# EAGLE board Very Simple Computer (EAGLE 6.5.0), part 1 of 2
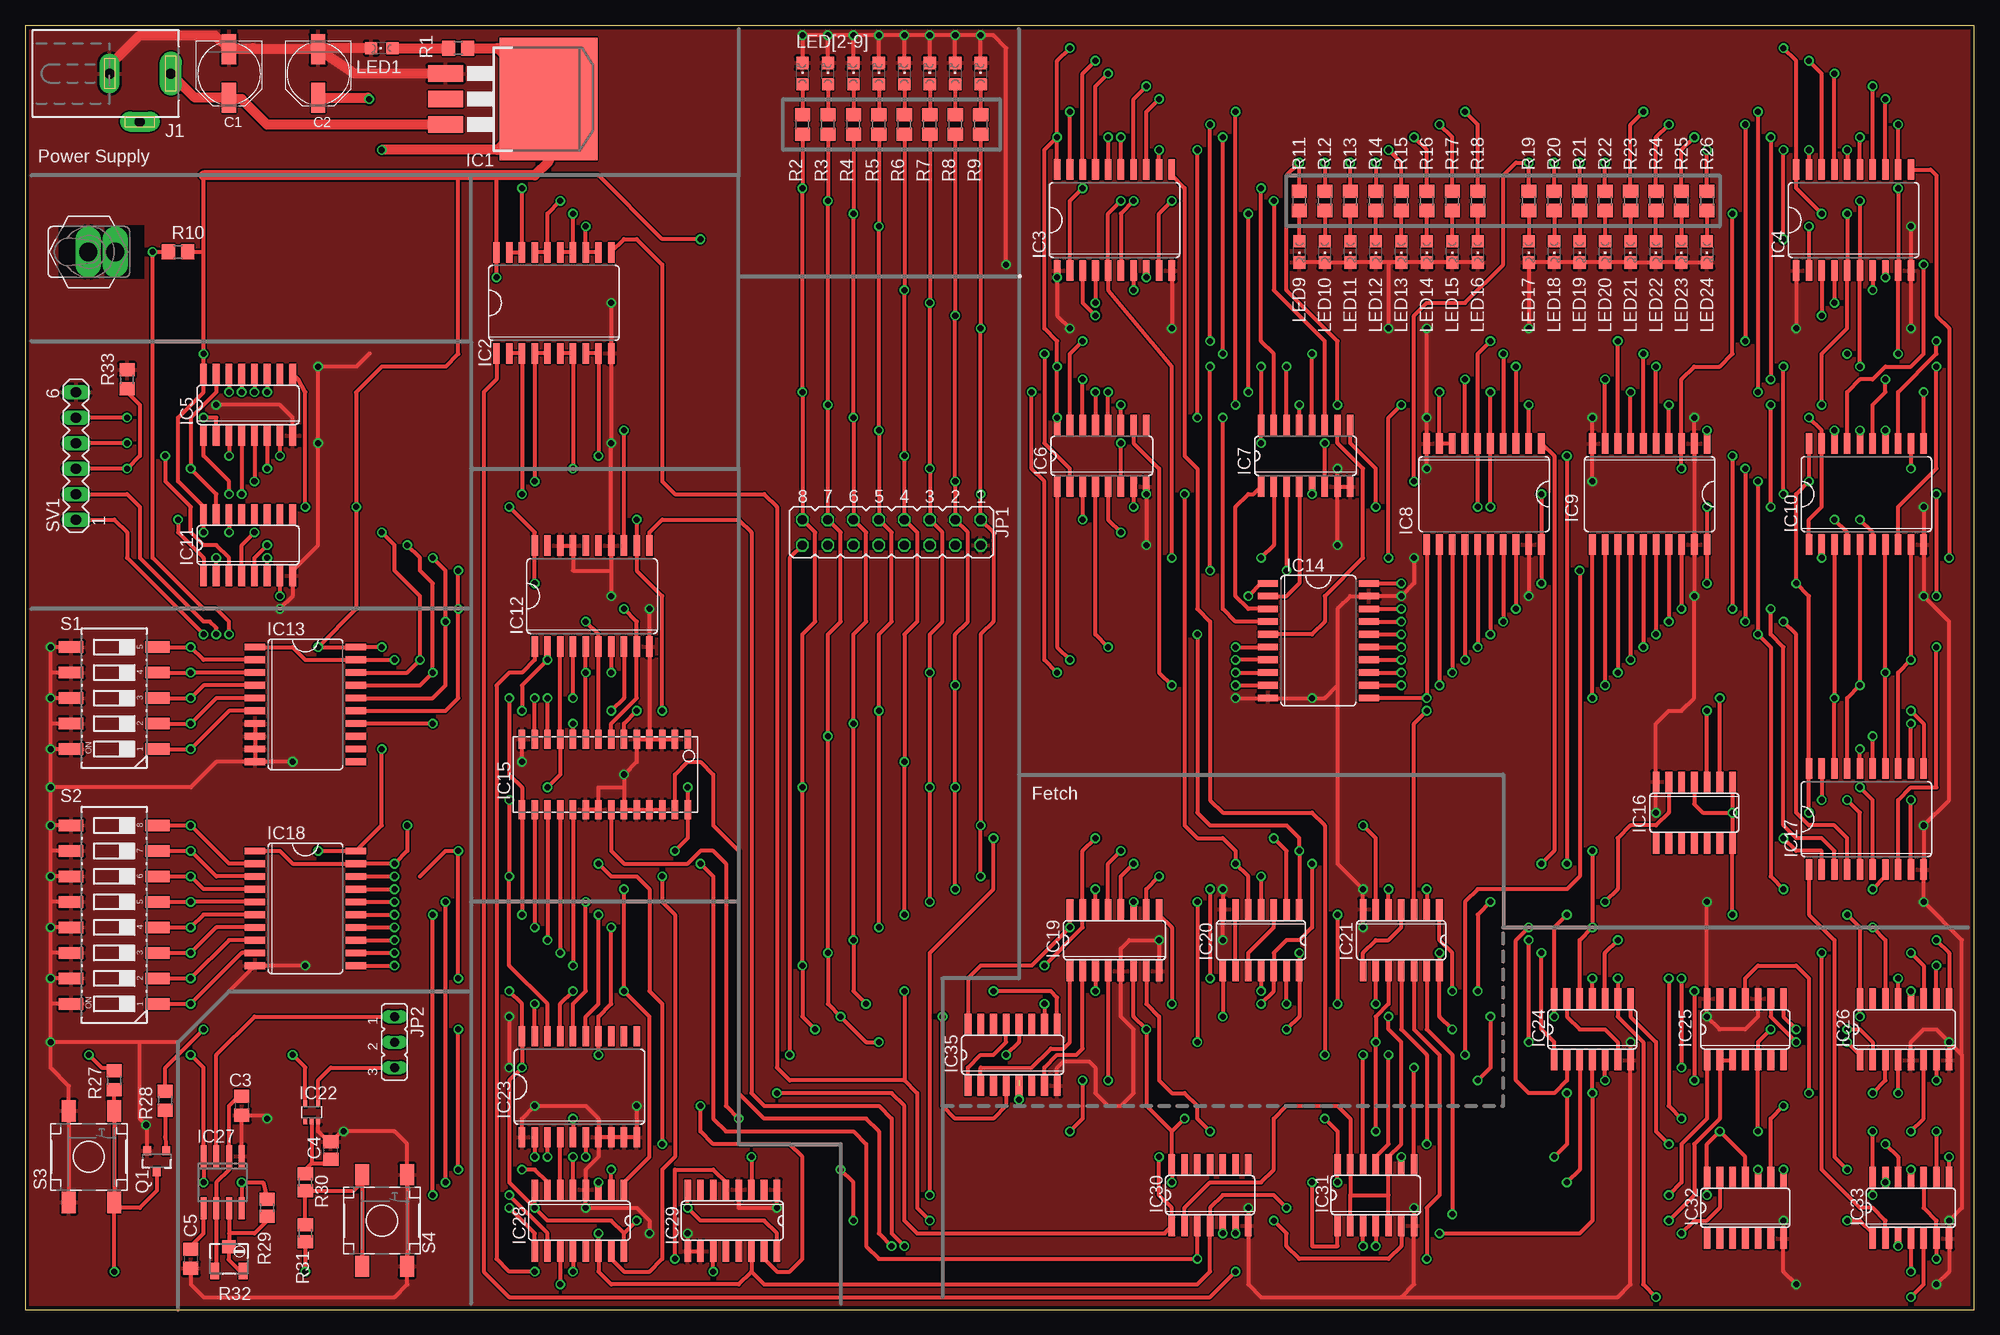
[diagram p0: board, top side]
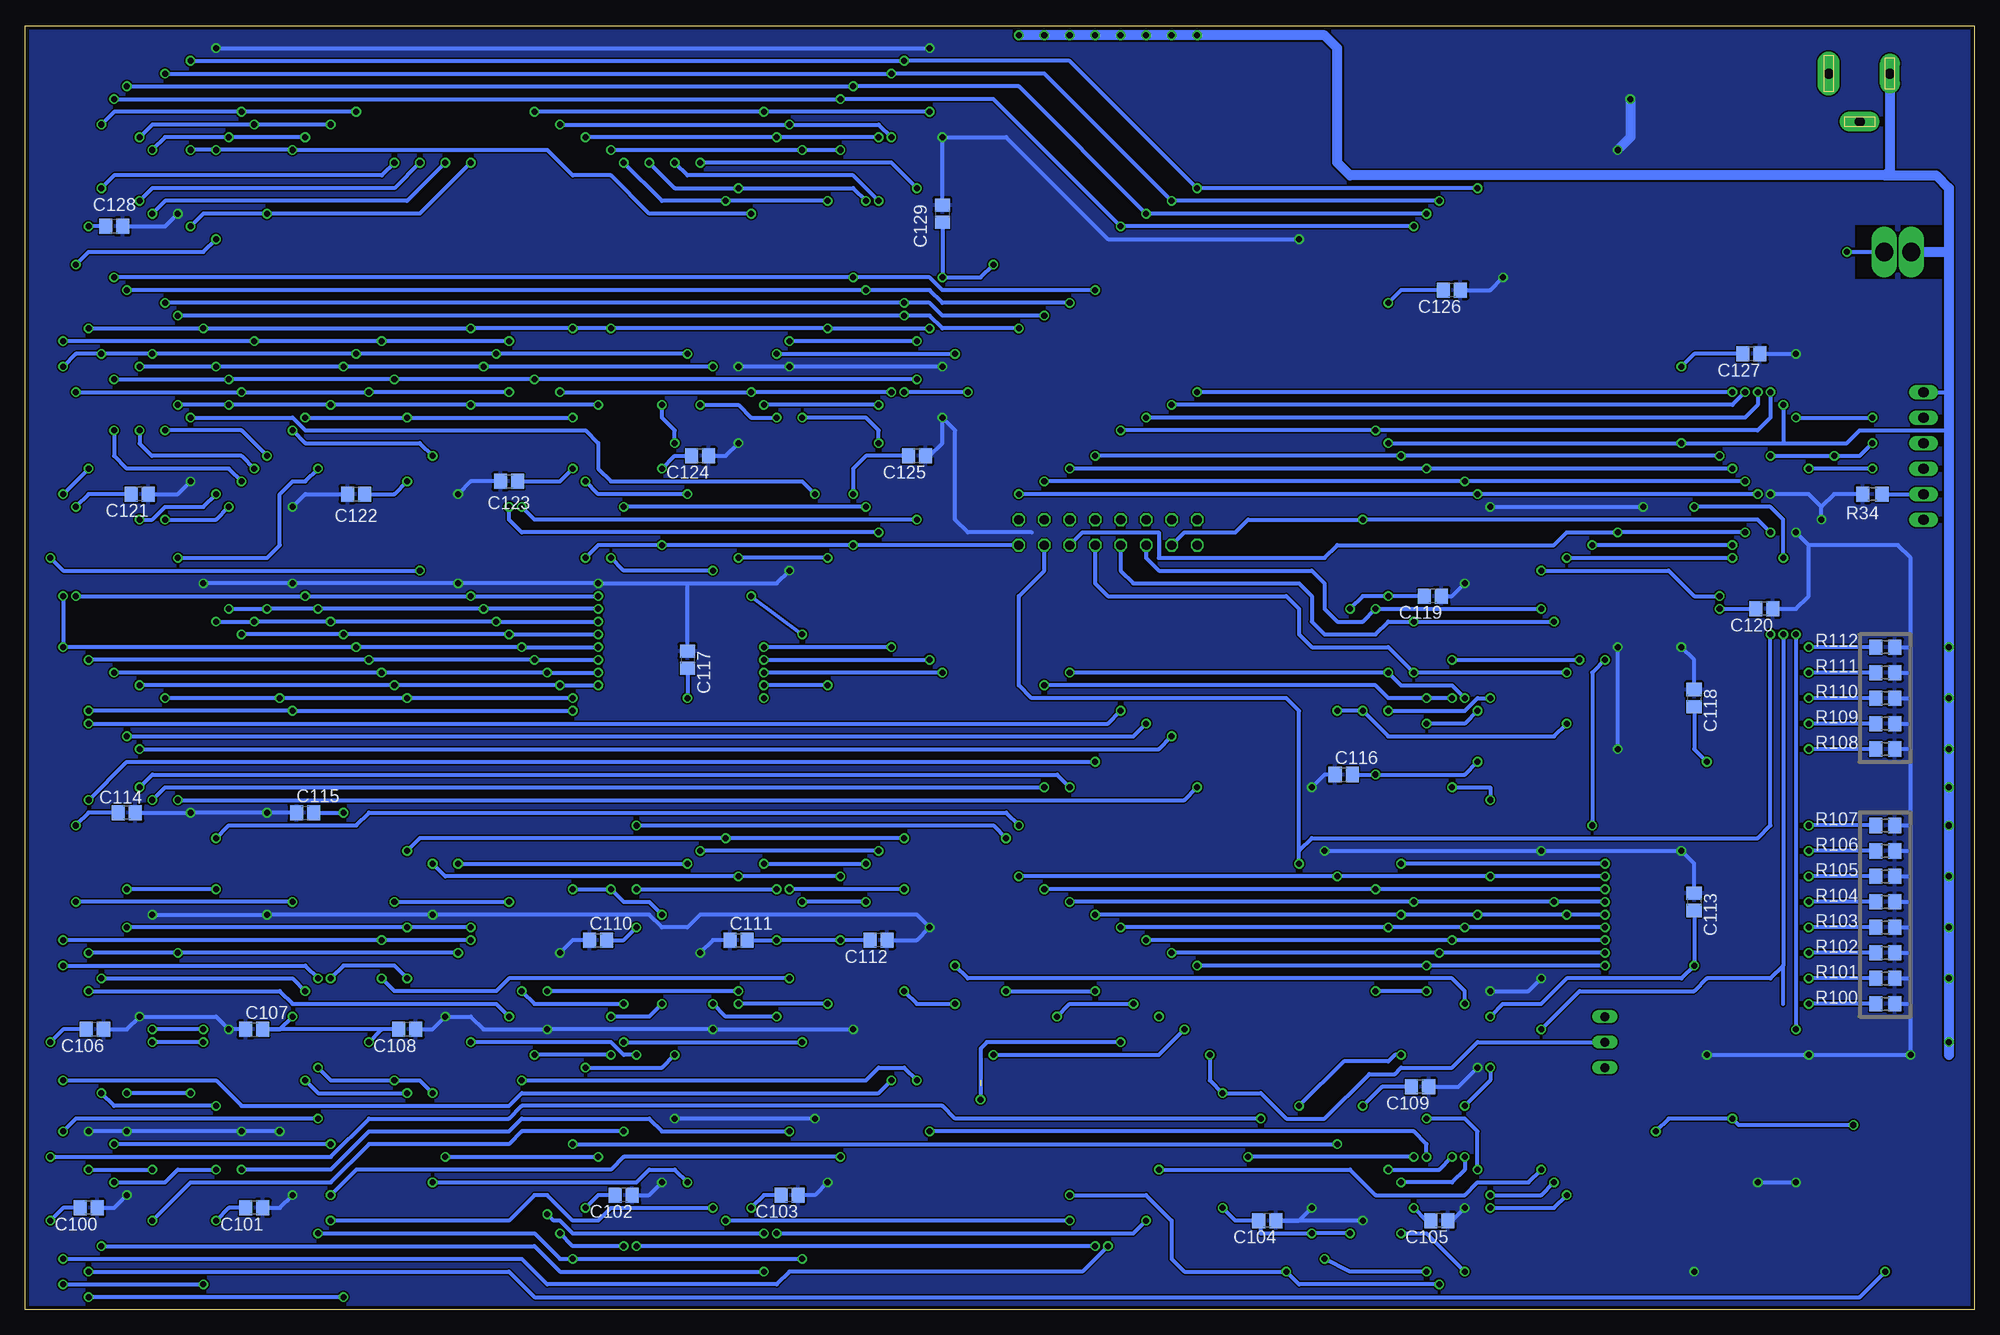
[diagram p1: board, bottom side, seen from below]

Size 194.29 x 127.94 mm. Coordinates in mm from the lower left corner, seen from the top.
Outline: 0,0 194.29,0 194.29,127.94 0,127.94 0,0
Copper layers (1*16): Top 0.0356mm / dielectric 1.5011mm / Bottom 0.0356mm
Design rules "OshPark *": minimum track width 6mil, minimum drill 13mil, track to track 6mil, track to pad 6mil, pad to pad 6mil, via to via 6mil, smd to smd 6mil, copper to edge 15mil, drill to drill 6mil, minimum pad ring 7mil, minimum via ring 7mil, stop-mask expansion 3mil, vias tented up to drill 0mil, thermal gap 10mil
Net classes: 2 Hi Power: width 1.778 mm

## Footprints (pad centres in the part's own frame; a part is rotated, then mirrored left to right if it is on the bottom)
PANASONIC_D = smd 3 x 1.4: + 2.4,0; - -2.4,0
C0805 = smd 1.3 x 1.5: 1 -0.95,0; 2 0.95,0
C0805' = smd 1.3 x 1.5: 1 -0.85,0; 2 0.85,0
D2PAK/A = smd 1.6 x 3.505: 1 -2.54,-8.89; 2 0,-8.89; 3 2.54,-8.89 | smd 12.192 x 9.754: 4 0,1.372
SO20W = smd 0.66 x 2.032: 1 -5.715,-5.029; 2 -4.445,-5.029; 3 -3.175,-5.029; 4 -1.905,-5.029; 5 -0.635,-5.029; 6 0.635,-5.029; 7 1.905,-5.029; 8 3.175,-5.029; 9 4.445,-5.029; 10 5.715,-5.029; 11 5.715,5.029; 12 4.445,5.029; 13 3.175,5.029; 14 1.905,5.029; 15 0.635,5.029; 16 -0.635,5.029; 17 -1.905,5.029; 18 -3.175,5.029; 19 -4.445,5.029; 20 -5.715,5.029
SO16 = smd 0.66 x 2.032: 1 -4.445,-3.073; 2 -3.175,-3.073; 3 -1.905,-3.073; 4 -0.635,-3.073; 5 0.635,-3.073; 6 1.905,-3.073; 7 3.175,-3.073; 8 4.445,-3.073; 9 4.445,3.073; 10 3.175,3.073; 11 1.905,3.073; 12 0.635,3.073; 13 -0.635,3.073; 14 -1.905,3.073; 15 -3.175,3.073; 16 -4.445,3.073
SOJ28/3 = smd 0.635 x 1.905: 1 -8.255,-3.505; 2 -6.985,-3.505; 3 -5.715,-3.505; 4 -4.445,-3.505; 5 -3.175,-3.505; 6 -1.905,-3.505; 7 -0.635,-3.505; 8 0.635,-3.505; 9 1.905,-3.505; 10 3.175,-3.505; 11 4.445,-3.505; 12 5.715,-3.505; 13 6.985,-3.505; 14 8.255,-3.505; 15 8.255,3.505; 16 6.985,3.505; 17 5.715,3.505; 18 4.445,3.505; 19 3.175,3.505; 20 1.905,3.505; 21 0.635,3.505; 22 -0.635,3.505; 23 -1.905,3.505; 24 -3.175,3.505; 25 -4.445,3.505; 26 -5.715,3.505; 27 -6.985,3.505; 28 -8.255,3.505
SO14 = smd 0.66 x 2.032: 1 -3.81,-3.073; 2 -2.54,-3.073; 3 -1.27,-3.073; 4 0,-3.073; 5 1.27,-3.073; 6 2.54,-3.073; 7 3.81,-3.073; 8 3.81,3.073; 9 2.54,3.073; 10 1.27,3.073; 11 0,3.073; 12 -1.27,3.073; 13 -2.54,3.073; 14 -3.81,3.073
SC70-5 = smd 0.4 x 0.7: 1 -0.65,-0.85; 2 0,-0.85; 3 0.65,-0.85; 4 0.65,0.85; 5 -0.65,0.85
SO08 = smd 0.6 x 2.2: 1 -1.905,-2.6; 2 -0.635,-2.6; 3 0.635,-2.6; 4 1.905,-2.6; 5 1.905,2.6; 6 0.635,2.6; 7 -0.635,2.6; 8 -1.905,2.6
PJ-002A = drill 1 pad 2.2 long: 1 0,3.1 | drill 1 pad 2 long: 2 0,-3; 3 4.8,0
JP8Q = drill 0.914 octagon: 1 -8.89,-1.27; 2 -8.89,1.27; 3 -6.35,-1.27; 4 -6.35,1.27; 5 -3.81,-1.27; 6 -3.81,1.27; 7 -1.27,-1.27; 8 -1.27,1.27; 9 1.27,-1.27; 10 1.27,1.27; 11 3.81,-1.27; 12 3.81,1.27; 13 6.35,-1.27; 14 6.35,1.27; 15 8.89,-1.27; 16 8.89,1.27
JP2 = drill 0.914 long: 1 -2.54,0; 2 0,0; 3 2.54,0
CHIPLED_0805 = smd 1.2 x 1.2: A 0,-1.05; C 0,1.05
SOT23-3 = smd 0.8 x 0.9: 1 -0.95,-1; 2 0.95,-1; 3 0,1.1
R0805 = smd 1.3 x 1.5: 1 -0.95,0; 2 0.95,0
R0805' = smd 1.3 x 1.5: 1 -0.85,0; 2 0.85,0
3223W = smd 0.9 x 1.6: 1 -1.4,-1.215; 3 1.4,-1.215 | smd 1.3 x 1.3: 2 0,1.215
MS243 = drill 1.803 pad 2 long: 1 0,-1.346; 2 0,1.346
CTS-219-05 = smd 1.13 x 2.44: 1 -5.08,-4.3; 2 -2.54,-4.3; 3 0,-4.3; 4 2.54,-4.3; 5 5.08,-4.3; 6 5.08,4.3; 7 2.54,4.3; 8 0,4.3; 9 -2.54,4.3; 10 -5.08,4.3
CTS-219-08 = smd 1.13 x 2.44: 1 -8.89,-4.3; 2 -6.35,-4.3; 3 -3.81,-4.3; 4 -1.27,-4.3; 5 1.27,-4.3; 6 3.81,-4.3; 7 6.35,-4.3; 8 8.89,-4.3; 9 8.89,4.3; 10 6.35,4.3; 11 3.81,4.3; 12 1.27,4.3; 13 -1.27,4.3; 14 -3.81,4.3; 15 -6.35,4.3; 16 -8.89,4.3
SMD-SW1 = smd 1.397 x 2.108: 1 2.515,4.572; 2 2.515,-4.547; 3 -1.981,4.572; 4 -1.981,-4.547
MA06-1 = drill 1.016 long: 1 -6.35,0; 2 -3.81,0; 3 -1.27,0; 4 1.27,0; 5 3.81,0; 6 6.35,0

## Placement (x,y rotation side)
C1  10uF 50V  [PANASONIC_D]  20.32,123.19 270 top
C2  10uF 50V  [PANASONIC_D]  29.21,123.19 270 top
C3  3.3uF  [C0805]  21.59,20.32 270 top
C4  1uF  [C0805']  30.48,15.88 90 top
C5  0.01uF  [C0805]  16.51,5.08 270 top
C100  [C0805']  187.96,10.16 180 bottom
C101  [C0805']  171.45,10.16 180 bottom
C102  [C0805']  134.62,11.43 180 bottom
C103  [C0805']  118.11,11.43 180 bottom
C104  [C0805']  70.48,8.89 180 bottom
C105  [C0805']  53.34,8.89 180 bottom
C106  [C0805']  187.32,27.94 180 bottom
C107  [C0805']  171.45,27.94 0 bottom
C108  [C0805']  156.21,27.94 180 bottom
C109  [C0805']  55.24,22.23 180 bottom
C110  [C0805']  137.16,36.83 0 bottom
C111  [C0805']  123.19,36.83 0 bottom
C112  [C0805']  109.22,36.83 180 bottom
C113  [C0805']  27.94,40.64 270 bottom
C114  [C0805']  184.15,49.53 180 bottom
C115  [C0805']  166.37,49.53 0 bottom
C116  [C0805']  62.87,53.34 0 bottom
C117  [C0805']  128.27,64.77 270 bottom
C118  [C0805']  27.94,60.96 270 bottom
C119  [C0805']  53.98,71.12 180 bottom
C120  [C0805']  20.95,69.85 180 bottom
C121  [C0805']  182.88,81.28 180 bottom
C122  [C0805']  161.29,81.28 0 bottom
C123  [C0805']  146.05,82.55 0 bottom
C124  [C0805']  127,85.09 180 bottom
C125  [C0805']  105.41,85.09 180 bottom
C126  [C0805']  52.07,101.6 180 bottom
C127  [C0805']  22.23,95.25 180 bottom
C128  [C0805']  185.42,107.95 180 bottom
C129  [C0805']  102.87,109.22 270 bottom
IC1  LD1086D2T50TR  [D2PAK/A]  50.8,120.65 270 top
IC2  74LS374DW  [SO20W]  52.7,100.33 0 top
IC3  74LS374DW  [SO20W]  108.58,108.58 0 top
IC4  74LS374DW  [SO20W]  182.25,108.58 0 top
IC5  4094D  [SO16]  22.23,90.17 0 top
IC6  74HCT283D  [SO16]  107.31,85.09 0 top
IC7  74HCT283D  [SO16]  127.64,85.09 0 top
IC8  74LS541DW  [SO20W]  145.41,81.28 180 top
IC9  74LS541DW  [SO20W]  161.93,81.28 180 top
IC10  74LS240DW  [SO20W]  183.51,81.28 0 top
IC11  4094D  [SO16]  22.23,76.2 0 top
IC12  74LS374DW  [SO20W]  56.52,71.12 0 top
IC13  74LS541DW  [SO20W]  27.94,60.33 270 top
IC14  74LS541DW  [SO20W]  128.91,66.67 270 top
IC15  IS61C64AL-10JLI  [SOJ28/3]  57.78,53.34 180 top
IC16  74LS74D  [SO14]  166.37,49.53 180 top
IC17  74LS374DW  [SO20W]  183.51,48.9 0 top
IC18  74LS541DW  [SO20W]  27.94,40.01 270 top
IC19  74LS138D  [SO16]  108.58,36.83 0 top
IC20  74LS08N  [SO14]  123.19,36.83 180 top
IC21  74ALS32N  [SO14]  137.16,36.83 180 top
IC22  74AHCT1G14DCK  [SC70-5]  28.57,19.68 0 top
IC23  74LS541DW  [SO20W]  55.24,22.23 0 top
IC24  74LS08N  [SO14]  156.21,27.94 0 top
IC25  74LS93D  [SO14]  171.45,27.94 0 top
IC26  74LS138D  [SO16]  187.32,27.94 0 top
IC27  NE555D  [SO08]  19.68,12.7 180 top
IC28  40193D  [SO16]  55.24,8.89 180 top
IC29  40193D  [SO16]  70.48,8.89 180 top
IC30  74ALS04D  [SO14]  118.11,11.43 0 top
IC31  74ALS32N  [SO14]  134.62,11.43 0 top
IC32  74LS74D  [SO14]  171.45,10.16 0 top
IC33  74LS08N  [SO14]  187.96,10.16 0 top
IC35  74LS175D  [SO16]  98.42,25.4 0 top
J1  2.5mm  [PJ-002A]  11.43,123.19 270 top
JP1  [JP8Q]  86.36,77.47 180 top
JP2  [JP2]  36.83,26.67 270 top
LED1  330  [CHIPLED_0805]  35.56,125.73 90 top
LED2  [CHIPLED_0805]  80.01,123.19 0 top
LED3  [CHIPLED_0805]  82.55,123.19 0 top
LED4  [CHIPLED_0805]  85.09,123.19 0 top
LED5  [CHIPLED_0805]  87.63,123.19 0 top
LED6  [CHIPLED_0805]  90.17,123.19 0 top
LED7  [CHIPLED_0805]  92.71,123.19 0 top
LED8  [CHIPLED_0805]  95.25,123.19 0 top
LED9  [CHIPLED_0805]  127,105.41 180 top
LED10  [CHIPLED_0805]  129.54,105.41 180 top
LED11  [CHIPLED_0805]  132.08,105.41 180 top
LED12  [CHIPLED_0805]  134.62,105.41 180 top
LED13  [CHIPLED_0805]  137.16,105.41 180 top
LED14  [CHIPLED_0805]  139.7,105.41 180 top
LED15  [CHIPLED_0805]  142.24,105.41 180 top
LED16  [CHIPLED_0805]  144.78,105.41 180 top
LED17  [CHIPLED_0805]  149.86,105.41 180 top
LED18  [CHIPLED_0805]  152.4,105.41 180 top
LED19  [CHIPLED_0805]  154.94,105.41 180 top
LED20  [CHIPLED_0805]  157.48,105.41 180 top
LED21  [CHIPLED_0805]  160.02,105.41 180 top
LED22  [CHIPLED_0805]  162.56,105.41 180 top
LED23  [CHIPLED_0805]  165.1,105.41 180 top
LED24  [CHIPLED_0805]  167.64,105.41 180 top
LED[2-9]  [CHIPLED_0805]  77.47,123.19 0 top
Q1  MBNT2222  [SOT23-3]  13.14,14.85 180 top
R1  [R0805]  43.18,125.73 0 top
R2  330  [R0805]  77.47,118.11 90 top
R3  [R0805]  80.01,118.11 90 top
R4  [R0805]  82.55,118.11 90 top
R5  [R0805]  85.09,118.11 90 top
R6  [R0805]  87.63,118.11 90 top
R7  [R0805]  90.17,118.11 90 top
R8  [R0805]  92.71,118.11 90 top
R9  [R0805]  95.25,118.11 90 top
R10  4.7K  [R0805]  15.24,105.41 0 top
R11  330  [R0805]  127,110.49 270 top
R12  [R0805]  129.54,110.49 270 top
R13  [R0805]  132.08,110.49 270 top
R14  [R0805]  134.62,110.49 270 top
R15  [R0805]  137.16,110.49 270 top
R16  [R0805]  139.7,110.49 270 top
R17  [R0805]  142.24,110.49 270 top
R18  [R0805]  144.78,110.49 270 top
R19  [R0805]  149.86,110.49 270 top
R20  [R0805]  152.4,110.49 270 top
R21  [R0805]  154.94,110.49 270 top
R22  [R0805]  157.48,110.49 270 top
R23  [R0805]  160.02,110.49 270 top
R24  [R0805]  162.56,110.49 270 top
R25  [R0805]  165.1,110.49 270 top
R26  [R0805]  167.64,110.49 270 top
R27  4.7K  [R0805]  8.89,22.86 90 top
R28  4.7K  [R0805]  13.96,20.85 90 top
R29  1K  [R0805']  24.13,10.16 270 top
R30  18K  [R0805']  27.94,12.7 270 top
R31  82K  [R0805']  27.94,7.62 270 top
R32  [3223W]  20.32,5.08 0 top
R33  1K  [R0805]  10.16,92.71 90 top
R34  4.7K  [R0805]  10.16,81.28 180 bottom
R100  4.7K  [R0805]  8.89,30.48 0 bottom
R101  4.7K  [R0805]  8.89,33.02 0 bottom
R102  4.7K  [R0805]  8.89,35.56 0 bottom
R103  4.7K  [R0805]  8.89,38.1 0 bottom
R104  4.7K  [R0805]  8.89,40.64 0 bottom
R105  4.7K  [R0805]  8.89,43.18 0 bottom
R106  4.7K  [R0805]  8.89,45.72 0 bottom
R107  4.7K  [R0805]  8.89,48.26 0 bottom
R108  4.7K  [R0805]  8.89,55.88 0 bottom
R109  4.7K  [R0805]  8.89,58.42 0 bottom
R110  4.7K  [R0805]  8.89,60.96 0 bottom
R111  4.7K  [R0805]  8.89,63.5 0 bottom
R112  4.7K  [R0805]  8.89,66.04 0 bottom
RESET  [MS243]  7.62,105.41 270 top
S1  219-05  [CTS-219-05]  8.89,60.96 90 top
S2  219-08  [CTS-219-08]  8.89,39.37 90 top
S3  [SMD-SW1]  6.35,15.24 0 top
S4  [SMD-SW1]  35.56,8.89 0 top
SV1  [MA06-1]  5.08,85.09 90 top

## Library data of the parts
C1-C3 C5 R1-R28 R33 R34 R100-R112 = rcl
C4 C100-C129 R29-R31 = resistor
IC1 IC20 IC21 IC24 IC31 IC33 J1 S3 S4 = rkt1
IC2-IC4 IC8-IC10 IC12-IC14 IC16-IC19 IC23 IC25 IC26 IC30 IC32 IC35 = 74xx-us
IC5 IC11 IC28 IC29 = 40xx
IC6 IC7 = 74xx-eu
IC15 = memory-sram
IC22 = 74xx-little-us
IC27 = linear
JP1 JP2 = jumper
LED1-LED24 LED[2-9] = led
Q1 = SparkFun
R32 = pot
RESET = switch
S1 S2 = switch-dil; OC_FARNELL: unknown; OC_NEWARK: unknown
SV1 = con-lstb; OC_FARNELL: unknown; OC_NEWARK: unknown

## Nets
+5V: IC35.1 IC35.13
`DEL: IC5.15 IC11.15 R33.1 SV1.3
ADD0: IC11.4 IC12.2 IC13.18 IC15.10 JP1.6
ADD1: IC11.5 IC12.5 IC13.17 IC15.9 JP1.8
ADD2: IC11.6 IC12.6 IC13.16 IC15.8 JP1.10
ADD3: IC11.7 IC12.9 IC13.15 IC15.7 JP1.12
ADD4: IC11.14 IC12.12 IC13.14 IC15.6 JP1.14
CLK: IC25.1 IC30.1 JP1.16 JP2.2
DB0: IC2.2 IC2.3 IC3.3 IC4.3 IC5.4 IC12.3 IC15.11 IC17.2 IC18.18 IC23.18 IC28.15 JP1.1 R9.1
DB1: IC2.4 IC2.5 IC3.4 IC4.4 IC5.5 IC12.4 IC15.12 IC17.5 IC18.17 IC23.17 IC28.1 JP1.3 R8.1
DB2: IC2.6 IC2.7 IC3.7 IC4.7 IC5.6 IC12.7 IC15.13 IC17.6 IC18.16 IC23.16 IC28.10 JP1.5 R7.1
DB3: IC2.8 IC2.9 IC3.8 IC4.8 IC5.7 IC12.8 IC15.15 IC17.9 IC18.15 IC23.15 IC28.9 JP1.7 R6.1
DB4: IC2.12 IC2.13 IC3.13 IC4.13 IC5.14 IC12.13 IC15.16 IC17.12 IC18.14 IC23.14 IC29.15 JP1.9 R5.1
DB5: IC2.14 IC2.15 IC3.14 IC4.14 IC5.13 IC15.17 IC17.15 IC18.13 IC35.4 JP1.11 R4.1
DB6: IC2.16 IC2.17 IC3.17 IC4.17 IC5.12 IC15.18 IC17.16 IC18.12 IC35.5 JP1.13 R3.1
DB7: IC2.18 IC2.19 IC3.18 IC4.18 IC5.11 IC15.19 IC17.19 IC18.11 IC35.12 JP1.15 R2.1
EXTCONN: IC30.5 R34.1 SV1.2
EXTLOAD: R28.2 SV1.1
GND: C1.- C2.- C3.2 C4.2 C5.2 C100.2 C101.2 C102.2 C103.2 C104.2 C105.2 C106.2 C107.2 C108.2 C109.2 C110.2 C111.2 C112.2 C113.2 C114.2 C115.2 C116.2 C117.2 C118.2 C119.2 C120.2 C121.2 C122.2 C123.2 C124.2 C125.2 C126.2 C127.2 C128.2 C129.2 IC1.1 IC2.10 IC3.1 IC3.10 IC4.1 IC4.10 IC5.8 IC6.8 IC7.7 IC7.8 IC8.10 IC8.19 IC9.2 IC9.10 IC9.19 IC10.10 IC11.8 IC12.10 IC12.14 IC12.17 IC12.18 IC13.7 IC13.8 IC13.9 IC13.10 IC14.10 IC14.19 IC15.2 IC15.3 IC15.4 IC15.5 IC15.14 IC15.20 IC15.21 IC15.23 IC15.24 IC15.25 IC15.26 IC16.7 IC17.10 IC18.10 IC19.5 IC19.8 IC20.7 IC21.7 IC22.3 IC23.1 IC23.7 IC23.8 IC23.9 IC23.10 IC24.7 IC25.10 IC25.14 IC26.5 IC26.8 IC27.1 IC28.4 IC29.1 IC29.4 IC29.9 IC29.10 IC30.7 IC31.7 IC32.7 IC33.7 IC35.8 J1.2 JP1.2 LED1.C LED2.C LED3.C LED4.C LED5.C LED6.C LED7.C LED8.C LED9.C LED10.C LED11.C LED12.C LED13.C LED14.C LED15.C LED16.C LED17.C LED18.C LED19.C LED20.C LED21.C LED22.C LED23.C LED24.C LED[2-9].C Q1.2 R33.2 RESET.1 S1.6 S1.7 S1.8 S1.9 S1.10 S2.9 S2.10 S2.11 S2.12 S2.13 S2.14 S2.15 S2.16 S3.3 S3.4 S4.1 S4.2 SV1.6
LAT1-0: IC3.2 IC7.6 R11.1
LAT1-1: IC3.5 IC7.2 R12.1
LAT1-2: IC3.6 IC7.15 R13.1
LAT1-3: IC3.9 IC7.11 R14.1
LAT1-4: IC3.12 IC6.6 R15.1
LAT1-5: IC3.15 IC6.2 R16.1
LAT1-6: IC3.16 IC6.15 R17.1
LAT1-7: IC3.19 IC6.11 R18.1
LAT2-0: IC4.2 IC7.5 IC9.3 IC10.2 R19.1
LAT2-1: IC4.5 IC7.3 IC8.2 IC9.4 IC10.4 R20.1
LAT2-2: IC4.6 IC7.14 IC8.3 IC9.5 IC10.6 R21.1
LAT2-3: IC4.9 IC7.12 IC8.4 IC9.6 IC10.8 R22.1
LAT2-4: IC4.12 IC6.5 IC8.5 IC9.7 IC10.11 R23.1
LAT2-5: IC4.15 IC6.3 IC8.6 IC9.8 IC10.13 R24.1
LAT2-6: IC4.16 IC6.14 IC8.7 IC9.9 IC10.15 R25.1
LAT2-7: IC4.19 IC6.12 IC8.8 IC8.9 IC10.17 R26.1
N$1: IC25.9 IC26.1
N$2: IC25.8 IC26.2
N$3: IC25.11 IC26.3
N$4: IC28.12 IC29.5
N$5: IC26.4 IC32.9
N$6: IC23.2 IC28.3
N$7: IC23.3 IC28.2
N$8: IC23.4 IC28.6
N$9: IC23.5 IC28.7
N$10: IC23.6 IC29.3
N$11: IC33.4 Q1.3 R27.1 S3.1 S3.2
N$12: IC20.8 IC20.13
N$13: IC20.6 IC20.9
N$14: Q1.1 R28.1
N$15: IC20.3 IC20.10
N$16: IC13.1 IC13.19 IC18.1 IC18.19 IC21.11
N$17: IC21.13 IC30.6
N$18: IC27.3 JP2.1
N$19: IC22.4 JP2.3
N$20: R30.2 R31.1 S4.3 S4.4
N$22: C4.1 IC22.2 R30.1
N$24: IC19.1 IC35.2
N$25: IC19.2 IC35.7
N$26: IC19.3 IC35.10
N$32: IC21.2 IC21.5 IC30.2 IC31.2 IC31.5 IC31.10 IC31.13
N$33: LED1.A R1.1
N$38: IC13.2 R112.1 S1.5
N$39: IC13.3 R111.1 S1.4
N$40: IC15.22 IC33.8
N$41: IC24.8 IC33.12
N$42: IC13.4 R110.1 S1.3
N$43: IC13.5 R109.1 S1.2
N$44: IC13.6 R108.1 S1.1
N$45: IC18.2 R107.1 S2.8
N$47: IC18.3 R106.1 S2.7
N$48: IC18.4 R105.1 S2.6
N$49: IC18.5 R104.1 S2.5
N$50: IC18.6 R103.1 S2.4
N$51: IC18.7 R102.1 S2.3
N$52: IC18.8 R101.1 S2.2
N$53: IC18.9 R100.1 S2.1
N$67: C5.1 IC27.5
N$68: IC27.7 R29.2 R32.2 R32.3
N$69: C3.1 IC27.2 IC27.6 R32.1
N$70: IC5.9 IC11.2
N$71: IC5.3 IC11.3 SV1.4
N$73: IC5.2 SV1.5
N$84: IC6.7 IC7.9
N$85: IC7.4 IC14.2
N$86: IC7.1 IC14.3
N$87: IC7.13 IC14.4
N$88: IC7.10 IC14.5
N$89: IC6.4 IC14.6
N$90: IC6.1 IC14.7
N$91: IC6.13 IC14.8
N$92: IC6.10 IC14.9
N$93: IC8.18 IC9.18 IC10.18 IC14.18 IC17.3
N$94: IC8.17 IC9.17 IC10.16 IC14.17 IC17.4
N$95: IC8.16 IC9.16 IC10.14 IC14.16 IC17.7
N$96: IC8.15 IC9.15 IC10.12 IC14.15 IC17.8
N$97: IC8.14 IC9.14 IC10.9 IC14.14 IC17.13
N$98: IC8.13 IC9.13 IC10.7 IC14.13 IC17.14
N$99: IC8.12 IC9.12 IC10.5 IC14.12 IC17.17
N$100: IC8.11 IC9.11 IC10.3 IC14.11 IC16.2 IC17.18
N$101: LED9.A R11.2
N$102: LED10.A R12.2
N$103: LED11.A R13.2
N$104: LED12.A R14.2
N$105: LED13.A R15.2
N$106: LED14.A R16.2
N$107: LED15.A R17.2
N$108: LED16.A R18.2
N$109: LED17.A R19.2
N$110: LED18.A R20.2
N$111: LED19.A R21.2
N$112: LED20.A R22.2
N$113: LED21.A R23.2
N$114: LED22.A R24.2
N$115: LED23.A R25.2
N$116: LED24.A R26.2
N$119: LED8.A R9.2
N$120: LED7.A R8.2
N$121: LED6.A R7.2
N$122: LED5.A R6.2
N$123: LED4.A R5.2
N$124: LED3.A R4.2
N$125: LED2.A R3.2
N$126: LED[2-9].A R2.2
PWRIN [Hi Power]: C1.+ IC1.3 J1.1
RESET: IC12.1 IC25.2 IC25.3 IC28.14 IC29.14 IC30.4
VCC: C2.+ C100.1 C101.1 C102.1 C103.1 C104.1 C105.1 C106.1 C107.1 C108.1 C109.1 C110.1 C111.1 C112.1 C113.1 C114.1 C115.1 C116.1 C117.1 C118.1 C119.1 C120.1 C121.1 C122.1 C123.1 C124.1 C125.1 C126.1 C127.1 C128.1 C129.1 IC1.4 IC2.20 IC3.20 IC4.20 IC5.1 IC5.16 IC6.16 IC7.16 IC8.20 IC9.20 IC10.20 IC11.1 IC11.16 IC12.20 IC13.20 IC14.20 IC15.28 IC16.1 IC16.4 IC16.14 IC17.20 IC18.20 IC19.6 IC19.16 IC20.14 IC21.14 IC22.5 IC23.20 IC24.14 IC25.5 IC26.6 IC26.16 IC27.4 IC27.8 IC28.8 IC28.16 IC29.8 IC29.16 IC30.14 IC31.14 IC32.11 IC32.14 IC33.14 IC35.16 R1.2 R10.2 R27.2 R29.1 R31.2 R34.2 R100.2 R101.2 R102.2 R103.2 R104.2 R105.2 R106.2 R107.2 R108.2 R109.2 R110.2 R111.2 R112.2
~ACC7: IC16.6 IC21.9
~ACCRE: IC17.1 IC33.11
~ACCWE: IC16.3 IC17.11 IC21.3
~ACCWE-NOCLK: IC20.11 IC21.1
~ADDEN: IC14.1 IC19.13 IC20.1
~CMPEN: IC10.1 IC10.19 IC19.12 IC20.5
~EXEEN: IC19.4 IC26.7
~HLT: IC19.7 IC32.10
~HLTLATCH: IC32.8 IC33.13
~INSY4: IC19.11 IC21.10 IC33.1
~IRRE: IC2.1 IC33.3
~IRRE-FETCH: IC24.1 IC26.11 IC33.2
~IRWE: IC2.11 IC31.6 IC35.9
~IRWE-NOCLK: IC24.4 IC26.13 IC31.4
~LAT1WE: IC3.11 IC31.8
~LAT1WE-NOCLK: IC24.5 IC26.10 IC31.9
~LAT2WE: IC4.11 IC31.11
~LAT2WE-NOCLK: IC24.10 IC26.9 IC31.12
~MARWE: IC12.11 IC31.3
~MARWE-NOCLK: IC24.3 IC31.1
~MEMRE: IC24.11 IC33.9
~MEMRE-FETCH: IC24.6 IC24.13
~MEMWE: IC19.14 IC24.9 IC33.5
~MEMWETOCHIP: IC15.27 IC33.6 IC33.10
~PCINC: IC26.12 IC28.5
~PCRE: IC19.15 IC20.2 IC23.19 IC24.2 IC24.12 IC26.14
~PCWE: IC21.6 IC28.11 IC29.11
~PCWE-NOCLK: IC21.4 IC21.8
~RESET: IC21.12 IC30.3 IC32.13 JP1.4 R10.1 RESET.2
~SHLEN: IC9.1 IC19.10 IC20.4
~SHREN: IC8.1 IC19.9 IC20.12